# EAGLE board Surprising Snaget (EAGLE 9.7.0)

Size 253.8 x 59.69 mm. Coordinates in mm from the lower left corner, seen from the top.
Outline: 0,0 253.8,0 253.8,59.69 0,59.69 0,0
Copper layers (1*16): Top 0.035mm / dielectric 1.5mm / Bottom 0.035mm
Design rules "default": minimum track width 6mil, minimum drill 0.35mm, track to track 6mil, track to pad 6mil, pad to pad 6mil, via to via 6mil, smd to smd 6mil, copper to edge 40mil, drill to drill 6mil, minimum pad ring 10mil, minimum via ring 8mil, stop-mask expansion 4mil, vias tented up to drill 0mil, thermal gap 10mil

## Footprints (pad centres in the part's own frame; a part is rotated, then mirrored left to right if it is on the bottom)
LEDRD254W60D565H860B_W = drill 0.981 pad 1.581: 1 -1.27,0; 2 1.27,0
LEDRD254W60D565H860B_G = drill 0.981 pad 1.581: 1 -1.27,0; 2 1.27,0
LEDRD254W60D565H860B_Y = drill 0.981 pad 1.581: 1 -1.27,0; 2 1.27,0
LEDRD254W60D565H860B = drill 0.981 pad 1.581: 1 -1.27,0; 2 1.27,0
PIEZO = drill 1 pad 1.6: 1 -3.5,0; 2 3.5,0
GL5528 = drill 0.8 pad 1.4: 1 -1.702,0; 2 1.702,0
RESAD1016W63L850D250B = drill 0.83 pad 1.43: 1 -5.08,0; 2 5.08,0
HA-06-SM065 = drill 1 pad 1.676: 1 -2.54,-2.54; 2 0,2.54; 3 2.54,-2.54
SWITCH-MOMENTARY-PTH-6.5MM = drill 1.016 pad 1.88: 1 -3.251,2.261; 2 3.251,2.261; 3 -3.251,-2.261; 4 3.251,-2.261
ARDUINO-UNO-R3-SHIELD = drill 1.016 pad 1.88: 3.3V 24.13,-2.54; 5V 24.13,0; A0 24.13,12.7; A1 24.13,15.24; A2 24.13,17.78; A3 24.13,20.32; A4 24.13,22.86; A5 24.13,25.4; AREF -24.13,-13.97; D2 -24.13,20.32; D3 -24.13,17.78; D4 -24.13,15.24; D5 -24.13,12.7; D6 -24.13,10.16; D7 -24.13,7.62; D8 -24.13,3.81; D9 -24.13,1.27; D10 -24.13,-1.27; D11 -24.13,-3.81; D12 -24.13,-6.35; D13 -24.13,-8.89; GND@0 24.13,2.54; GND@1 24.13,5.08; GND@2 -24.13,-11.43; IOREF 24.13,-7.62; NC 24.13,-10.16; RES 24.13,-5.08; RX -24.13,25.4; SCL -24.13,-19.05; SDA -24.13,-16.51; TX -24.13,22.86; VIN 24.13,7.62

## Placement (x,y rotation side)
D1  WHITE  [LEDRD254W60D565H860B_W]  109.98,42.9 180 top
D2  GREEN  [LEDRD254W60D565H860B_G]  127.76,42.9 180 top
D3  YELLOW  [LEDRD254W60D565H860B_Y]  148.08,42.9 180 top
D4  RED  [LEDRD254W60D565H860B]  168.4,42.9 180 top
PIEZO1  PIEZO  [PIEZO]  242.06,40.36 0 top
R1  PHOTOCELL_GL5528  [GL5528]  216.66,40.36 0 top
R2  1k  [RESAD1016W63L850D250B]  101.09,14.96 90 top
R3  1k  [RESAD1016W63L850D250B]  116.33,40.36 0 top
R4  1k  [RESAD1016W63L850D250B]  134.11,40.36 0 top
R5  1k  [RESAD1016W63L850D250B]  154.43,40.36 0 top
R6  1k  [RESAD1016W63L850D250B]  174.75,40.36 0 top
R7  1k  [RESAD1016W63L850D250B]  217.93,30.2 90 top
RPOT1  250k  [HA-06-SM065]  192.53,40.36 0 top
S1  SWITCH_MOMENTARY  [SWITCH-MOMENTARY-PTH-6.5MM]  103.63,31.47 90 top
U1  ARDUINO-UNO-R3-SHIELD  [ARDUINO-UNO-R3-SHIELD]  47.88,29.84 270 top

## Library data of the parts
D1 = Tinkercad; CATEGORY: Opto-Electronic; SUB-CATEGORY: LED; VALUE: LED_WHITE
D2 = Tinkercad; CATEGORY: Opto-Electronic; SUB-CATEGORY: LED; VALUE: LED_GREEN
D3 = Tinkercad; CATEGORY: Opto-Electronic; SUB-CATEGORY: LED; VALUE: LED_YELLOW
D4 = Tinkercad; CATEGORY: Opto-Electronic; SUB-CATEGORY: LED; VALUE: LED_RED
PIEZO1 R1-R7 RPOT1 S1 U1 = Tinkercad

## Nets
D1_A: D1.1 R3.1
D2_A: D2.1 R4.1
D3_A: D3.1 R5.1
D4_A: D4.1 R6.1
U1_5V: R7.1 RPOT1.3 S1.3 S1.4 U1.5V
U1_A2: RPOT1.2 U1.A2
U1_A4: R1.2 R7.2 U1.A4
U1_D2: R6.2 U1.D2
U1_D4: R5.2 U1.D4
U1_D7: R4.2 U1.D7
U1_D8: R2.2 S1.1 S1.2 U1.D8
U1_D12: PIEZO1.1 U1.D12
U1_D13: R3.2 U1.D13
U1_GND: D1.2 D2.2 D3.2 D4.2 PIEZO1.2 R1.1 R2.1 RPOT1.1 U1.GND@0 U1.GND@1 U1.GND@2

## Tracks (layer width: path | path; a pad name or v marks a point on that pad's centre or on a via)
D1_A  (1 unrouted)
D2_A  (1 unrouted)
D3_A  (1 unrouted)
D4_A  (1 unrouted)
U1_5V  (4 unrouted)
U1_A2  (1 unrouted)
U1_A4  (2 unrouted)
U1_D2  (1 unrouted)
U1_D4  (1 unrouted)
U1_D7  (1 unrouted)
U1_D8  (3 unrouted)
U1_D12  (1 unrouted)
U1_D13  (1 unrouted)
U1_GND  (10 unrouted)